# Altium PCB PCB1.PcbDoc
Units mm, origin at the board's own origin, x right, y up, seen from the top; angles counter-clockwise.
Board outline 86 x 38 mm, 2 copper layers (Top Layer, Bottom Layer), stack 1.571 mm thick; 25 components, 104 nets, 291 pads, 77 vias.
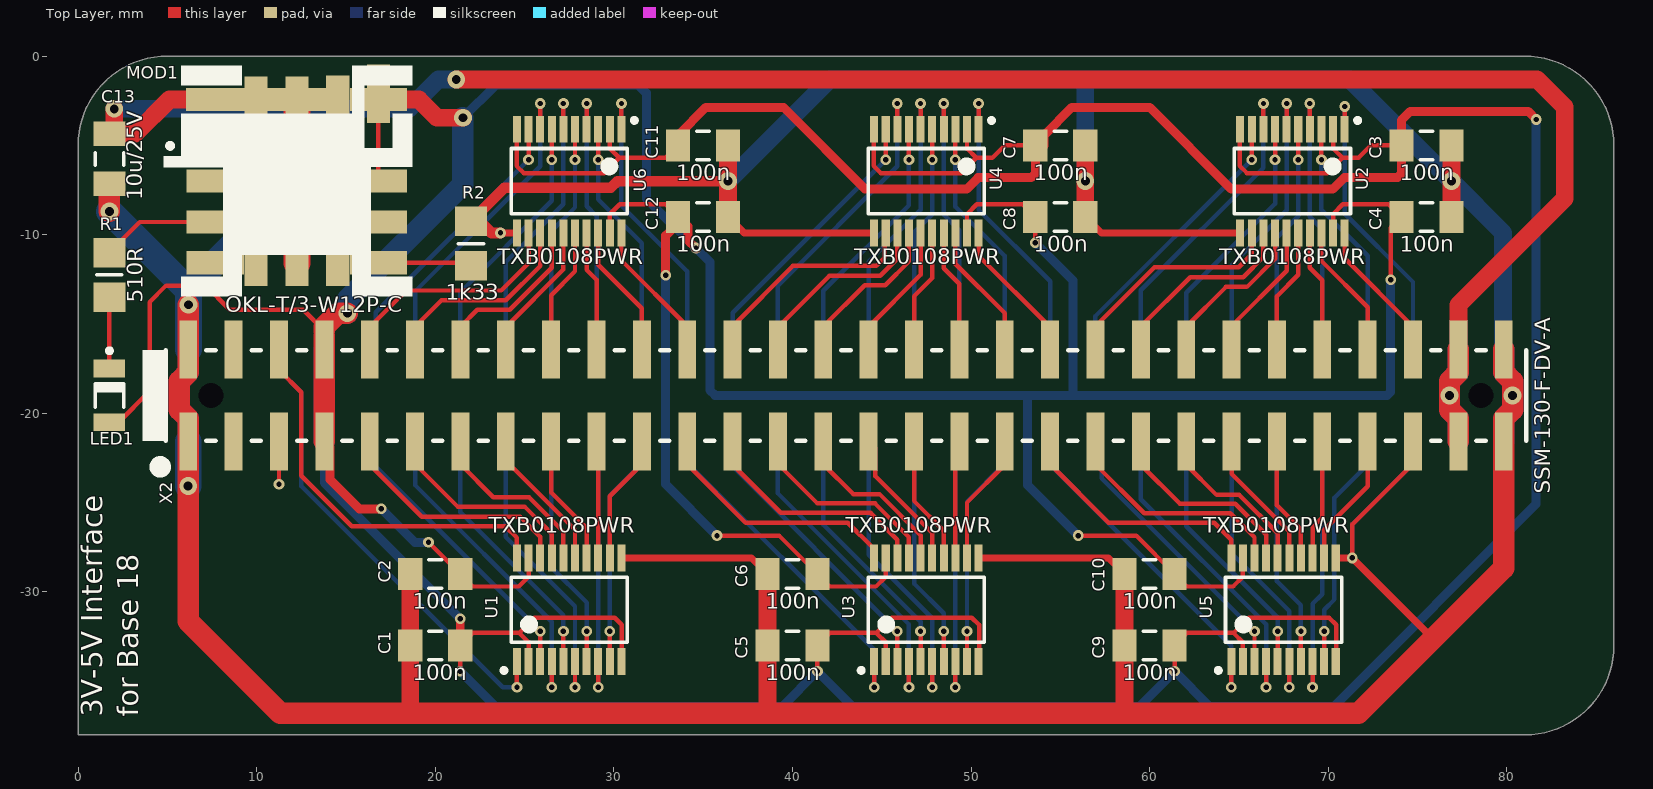
[diagram p0: Top Layer view]
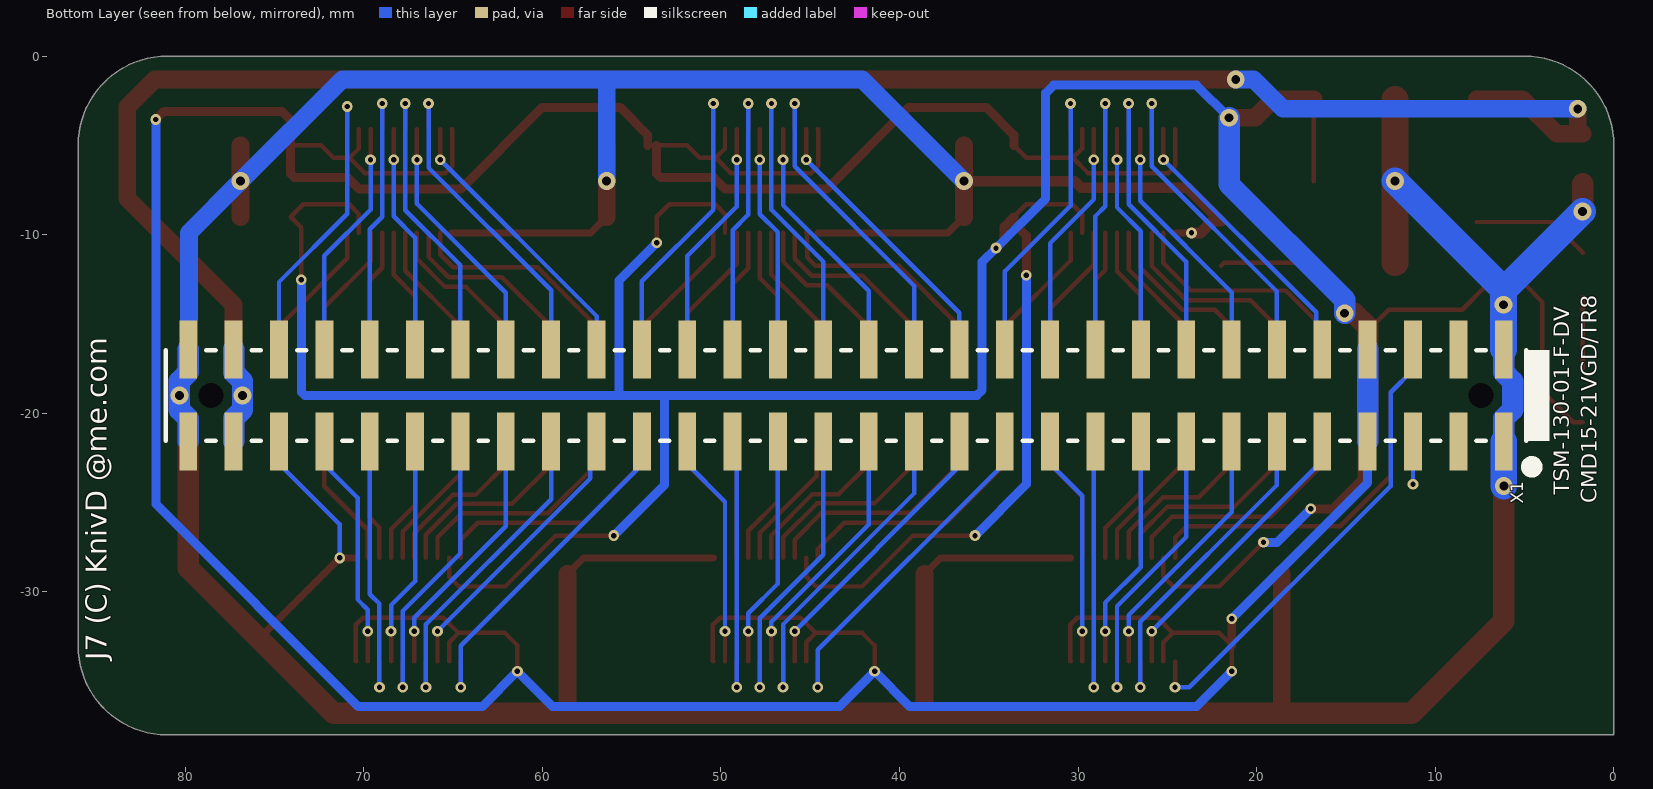
[diagram p1: Bottom Layer view, seen from below]
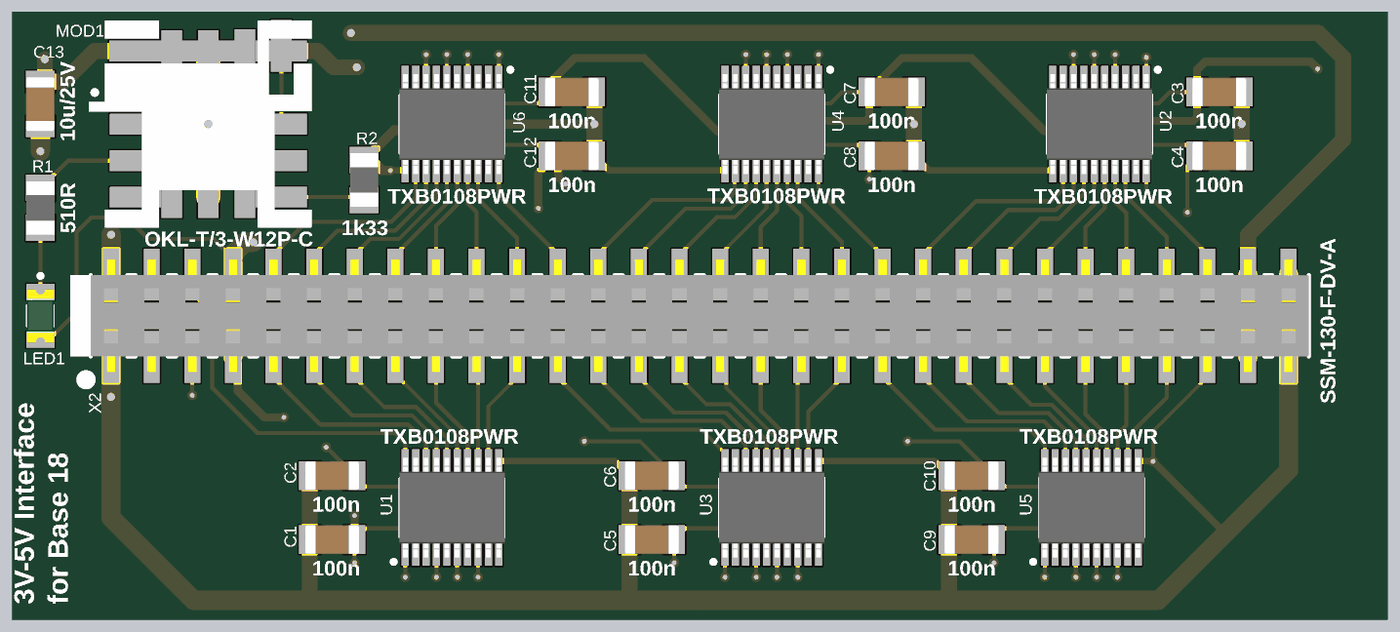
[diagram p2: 3D render of the assembled board from above, using the file's embedded part models]

## Layer stack, top to bottom
Top Solder: solder mask 0.0102, Solder Resist, Dk 3.5
Top Layer: signal copper 0.0356
Dielectric 1: core 1.5, FR-4, Dk 4.2
Bottom Layer: signal copper 0.0356
Solder Side: solder mask 0.0102, Solder Resist, Dk 3.5

## Board outline
0,-38 0,-5 cw(c5,-5) 5,0 81,0 cw(c81,-5) 86,-5 86,-33.016 cw(c81,-33.016) 81.399,-38

## Design rules (kind name [scope] priority, off if disabled: settings)
Clearance Clearance_Pour [IsRegion] p1: gap=0.3 ignorepadtopadclearanceinfootprint=TRUE
Clearance [All] p2: gap=0.2 ignorepadtopadclearanceinfootprint=TRUE
Height [All] p1: minheight=0 maxheight=100 prefheight=12.7
HoleSize [All] p1: absolutevalues=TRUE maxlimit=5 minlimit=0.025 maxpercent=80.000 minpercent=20.000
HoleToHoleClearance [All] p1: gap=0 allowstackedmicrovias=TRUE
MinimumSolderMaskSliver [All] p1: minsoldermaskwidth=0
PolygonConnect [All] p1: thpad.connectstyle=Relief thpad.reliefconductorwidth=0.25 thpad.reliefentries=4 thpad.polygonreliefangle="90 Angle" thpad.airgapwidth=0.25 smdpad.connectstyle=Relief smdpad.reliefconductorwidth=0.25 smdpad.reliefentries=4 smdpad.polygonreliefangle="90 Angle" smdpad.airgapwidth=0.25 via.connectstyle=Direct via.reliefconductorwidth=0.254 via.reliefentries=4 via.polygonreliefangle="45 Angle" via.airgapwidth=0.254
RoutingVias [All] p1: holewidth=0.3 width=0.6 viastyle="Through Hole" minholewidth=0.25 minwidth=0.5 maxholewidth=1.5 maxwidth=3
SilkToSilkClearance [All] p1: silktosilkclearance=-10
SilkToSolderMaskClearance [IsPad] p1: minsilkscreentomaskgap=-10 clearancetoexposedcopper=TRUE
SolderMaskExpansion SolderMaskExpansion_VIA [IsVia] p1: expansion=-0.3 soldermaskfromhole=TRUE
SolderMaskExpansion [All] p2: expansion=0.102
Width [All] p1: maxlimit=10 minlimit=0.2 preferedwidth=0.25
24 further rules are at their usual default settings.

## Components (designator, comment, footprint, x,y, rotation, side; value= is the part's Value field where it differs from the comment)
C1 "100n" CAPC3216X110N 20,-33 r180 top locked
C2 "100n" CAPC3216X110N 20,-29 r180 top locked
C3 "100n" CAPC3216X110N 75.5,-5 r0 top locked
C4 "100n" CAPC3216X110N 75.5,-9 r0 top locked
C5 "100n" CAPC3216X110N 40,-33 r180 top locked
C6 "100n" CAPC3216X110N 40,-29 r180 top locked
C7 "100n" CAPC3216X110N 55,-5 r0 top locked
C8 "100n" CAPC3216X110N 55,-9 r0 top locked
C9 "100n" CAPC3216X110N 60,-33 r180 top locked
C10 "100n" CAPC3216X110N 60,-29 r180 top locked
C11 "100n" CAPC3216X110N 35,-5 r0 top locked
C12 "100n" CAPC3216X110N 35,-9 r0 top locked
C13 "10u/25V" CAPC3216X110N 1.75,-5.75 r90 top locked
LED1 "CMD15-21VGD/TR8" LED_OSRAM_LGN971 1.75,-19 r270 top locked
MOD1 "OKL-T/3-W12P-C" OKL-T/3-W12 12.25,-7 r0 top locked
R1 "510R" RESC3216X75N 1.75,-12.25 r270 top locked
R2 "1k33" RESC3216X75N 22,-10.5 r270 top locked
U1 "TXB0108PWR" SOP65P640X120-20N 27.5,-31 r90 top locked
U2 "TXB0108PWR" SOP65P640X120-20N 68,-7 r270 top locked
U3 "TXB0108PWR" SOP65P640X120-20N 47.5,-31 r90 top locked
U4 "TXB0108PWR" SOP65P640X120-20N 47.5,-7 r270 top locked
U5 "TXB0108PWR" SOP65P640X120-20N 67.5,-31 r90 top locked
U6 "TXB0108PWR" SOP65P640X120-20N 27.5,-7 r270 top locked
X1 "TSM-130-01-F-DV" 2015-2X30XD-M 43,-19 r0 bottom locked
X2 "SSM-130-F-DV-A" 2015-2X30XD-F 43,-19 r0 top locked

## Footprints (in the part's own frame and the unit in brackets; to place one, negate y for a bottom-side part, rotate by r counter-clockwise, add the part's x,y. Pads: shape width x height; smd on the part's side, far side on the other; paste and mask are expansions set on the pad)
2015-2X30XD-F [mm] "Pin Header, 2.54mm x 2.54mm"
  rect 1x3.25 smd: 1(-36.83,-2.575) 2(-36.83,2.575) 3(-34.29,-2.575) 4(-34.29,2.575) 5(-31.75,-2.575) 6(-31.75,2.575) 7(-29.21,-2.575) 8(-29.21,2.575) 9(-26.67,-2.575) 10(-26.67,2.575) 11(-24.13,-2.575) 12(-24.13,2.575) 13(-21.59,-2.575) 14(-21.59,2.575) 15(-19.05,-2.575) 16(-19.05,2.575) 17(-16.51,-2.575) 18(-16.51,2.575) 19(-13.97,-2.575) 20(-13.97,2.575) 21(-11.43,-2.575) 22(-11.43,2.575) 23(-8.89,-2.575) 24(-8.89,2.575) 25(-6.35,-2.575) 26(-6.35,2.575) 27(-3.81,-2.575) 28(-3.81,2.575) 29(-1.27,-2.575) 30(-1.27,2.575) 31(1.27,-2.575) 32(1.27,2.575) 33(3.81,-2.575) 34(3.81,2.575) 35(6.35,-2.575) 36(6.35,2.575) 37(8.89,-2.575) 38(8.89,2.575) 39(11.43,-2.575) 40(11.43,2.575) 41(13.97,-2.575) 42(13.97,2.575) 43(16.51,-2.575) 44(16.51,2.575) 45(19.05,-2.575) 46(19.05,2.575) 47(21.59,-2.575) 48(21.59,2.575) 49(24.13,-2.575) 50(24.13,2.575) 51(26.67,-2.575) 52(26.67,2.575) 53(29.21,-2.575) 54(29.21,2.575) 55(31.75,-2.575) 56(31.75,2.575) 57(34.29,-2.575) 58(34.29,2.575) 59(36.83,-2.575) 60(36.83,2.575)
  silkscreen extent -39.4,-4.3 38.1,2.54, body extent -38.1,-3.52 38.1,3.52, height 7.37
2015-2X30XD-M [mm] "Pin Header, 2.54mm x 2.54mm"
  round 0 hole 1.4 unplated: 0(-35.56,0) 0(35.56,0)
  rect 1x3.25 smd: 1(-36.83,2.575) 2(-36.83,-2.575) 3(-34.29,2.575) 4(-34.29,-2.575) 5(-31.75,2.575) 6(-31.75,-2.575) 7(-29.21,2.575) 8(-29.21,-2.575) 9(-26.67,2.575) 10(-26.67,-2.575) 11(-24.13,2.575) 12(-24.13,-2.575) 13(-21.59,2.575) 14(-21.59,-2.575) 15(-19.05,2.575) 16(-19.05,-2.575) 17(-16.51,2.575) 18(-16.51,-2.575) 19(-13.97,2.575) 20(-13.97,-2.575) 21(-11.43,2.575) 22(-11.43,-2.575) 23(-8.89,2.575) 24(-8.89,-2.575) 25(-6.35,2.575) 26(-6.35,-2.575) 27(-3.81,2.575) 28(-3.81,-2.575) 29(-1.27,2.575) 30(-1.27,-2.575) 31(1.27,2.575) 32(1.27,-2.575) 33(3.81,2.575) 34(3.81,-2.575) 35(6.35,2.575) 36(6.35,-2.575) 37(8.89,2.575) 38(8.89,-2.575) 39(11.43,2.575) 40(11.43,-2.575) 41(13.97,2.575) 42(13.97,-2.575) 43(16.51,2.575) 44(16.51,-2.575) 45(19.05,2.575) 46(19.05,-2.575) 47(21.59,2.575) 48(21.59,-2.575) 49(24.13,2.575) 50(24.13,-2.575) 51(26.67,2.575) 52(26.67,-2.575) 53(29.21,2.575) 54(29.21,-2.575) 55(31.75,2.575) 56(31.75,-2.575) 57(34.29,2.575) 58(34.29,-2.575) 59(36.83,2.575) 60(36.83,-2.575)
  silkscreen extent -39.4,-2.54 38.1,4.3, body extent -38.1,-3.85 38.1,3.85, height 9.65
CAPC3216X110N [mm] "Chip Capacitor, Body 3.2x1.6mm, IPC Medium Density"
  rect 1.35x1.8 smd: 1(-1.4,0) 2(1.4,0)
  silkscreen extent -0.35,-0.8 0.35,0.8, body extent -1.7,-0.9 1.7,0.9, height 1.1
LED_OSRAM_LGN971 [mm] "Green Chip LED, 2-Leads, Body 3.2 x1.6mm, IPC Medium Density"
  rect 1x1.75 smd: 1(-1.5,0) 2(1.5,0)
  silkscreen extent -2.62,-0.8 0.65,0.8, body extent -1.65,-0.85 1.65,0.85, height 1.2
OKL-T/3-W12 [mm] "[Murata] 12.7x12.7mm 3A DC-DC module"
  rect 3.2x1.3 smd: 1(-4.57,0) 2(-4.57,4.57) 4(4.57,4.57) 5(4.57,0) 6(4.57,-4.57) 9(-4.57,-4.57) 10(-4.57,-2.29) 11(4.57,-2.29)
  rect 3.26x1.3 smd: 2(-4.57,4.57)
  rect 1.3x2.6 smd: 2(-2.29,4.57) 3(0,4.57) 7(0,-4.57) 8(-2.29,-4.57) 12(2.29,-4.57)
  rect 3.585x1.3 smd: 3(-0.15,4.57)
  rect 1.3x2.7 smd: 3(2.29,4.57)
  rect 1.3x3.26 smd: 4(4.57,4.895)
  silkscreen extent -7.48,-6.48 6.48,6.48, body extent -6.48,-6.48 6.47,6.48, height 5.2
RESC3216X75N [mm] "Chip Resistor, EIA 1206, Metric 3216, Body 3.2x1.6mm, IPC Medium Density"
  rect 1.65x1.8 smd: 1(-1.25,0) 2(1.25,0)
  silkscreen extent 0,-0.7 0,0.7, body extent -1.67,-0.87 1.68,0.88, height 0.75
SOP65P640X120-20N [mm] "SOP, 20-Leads, Body 6.5x4.4mm, Pitch 0.65mm, IPC Medium Density"
  rect 1.5x0.45 smd: 1(-2.9,2.925) 2(-2.9,2.275) 3(-2.9,1.625) 4(-2.9,0.975) 5(-2.9,0.325) 6(-2.9,-0.325) 7(-2.9,-0.975) 8(-2.9,-1.625) 9(-2.9,-2.275) 10(-2.9,-2.925) 11(2.9,-2.925) 12(2.9,-2.275) 13(2.9,-1.625) 14(2.9,-0.975) 15(2.9,-0.325) 16(2.9,0.325) 17(2.9,0.975) 18(2.9,1.625) 19(2.9,2.275) 20(2.9,2.925)
  silkscreen extent -3.52,-3.25 1.82,3.77, body extent -3.12,-3.3 3.12,3.3, height 1.2

## Part data
C1 C2 C3 C4 C5 C6 C7 C8 C9 C10 C11 C12 C13: library part Capacitor, "Capacitor"
  C13: Note=10u/25V
LED1: library part LED, "Light Emitting Diode"
MOD1: library part OKL-T/3-W12, "Programmable Output 3-Amp iLGA SMT PoLs", Manufacturer=Murata
R1 R2: library part Resistor, "Resistor"
U1 U2 U3 U4 U5 U6: "8-bit bidirectional voltage translator", Manufacturer="Texas Instruments"
X1 X2: library part "Connector 2x30", "Dual row, 60-way connector"

## Via types
v1: diameter 0.6, hole 0.3, Top Layer to Bottom Layer, tented both sides, 64 vias
v2: diameter 1, hole 0.5, Top Layer to Bottom Layer, tented both sides, 13 vias

## Nets (pads, with @x,y where several pads share a name; then routed paths per layer and width w, separated by ;. In a path a pad name is that pad's centre, name@x,y a point inside that pad or via, vN(x,y) a via of type N, cw(c..) or ccw(c..) an arc to the next point about the centre after c; other vN are vias at no path point)
+3V3: C1.1 C3.1 C5.1 C7.1 C9.1 C11.1 U1.2 U1.10 U2.2 U2.10 U3.2 U3.10 U4.2 U4.10 U5.2 U5.10 U6.2 U6.10 X1.7 X1.8 | length 256.5
  Top Layer w0.25: v1(21.4,-34.45) C1.1 22.1,-32.3 24.7,-32.3 ; U6.10 24.55,-4.125 24.55,-6.15 24.95,-6.55 29.45,-6.55 30.3,-5.7 ; U1.2 25.225,-32.825 24.7,-32.3 ; U6.2 29.775,-5.175 30.3,-5.7 ; U1.10 30.45,-33.875 30.45,-31.85 30.05,-31.45 25.55,-31.45 24.7,-32.3 ; C11.1 32.9,-5.7 30.3,-5.7 ; v1(41.4,-34.45) C5.1 42.1,-32.3 44.7,-32.3 ; U4.10 44.55,-4.125 44.55,-6.15 44.95,-6.55 49.45,-6.55 50.3,-5.7 ; U3.2 45.225,-32.825 44.7,-32.3 ; U4.2 49.775,-5.175 50.3,-5.7 ; U3.10 50.45,-33.875 50.45,-31.85 50.05,-31.45 45.55,-31.45 44.7,-32.3 ; C7.1 51.9,-5 51.2,-5.7 50.3,-5.7 ; v1(61.4,-34.45) C9.1 62.1,-32.3 64.7,-32.3 ; U2.10 65.05,-4.125 65.05,-6.15 65.45,-6.55 69.95,-6.55 70.8,-5.7 ; U5.2 65.225,-32.825 64.7,-32.3 ; U2.2 70.275,-5.175 70.8,-5.7 ; U5.10 70.45,-33.875 70.45,-31.85 70.05,-31.45 65.55,-31.45 64.7,-32.3 ; C3.1 72.4,-5 71.7,-5.7 70.8,-5.7
  Top Layer w0.5: C1.1 v1(21.4,-31.5) ; C11.1 33.6,-4.425 35.15,-2.875 39.5,-2.875 44.075,-7.45 49.75,-7.45 50.4,-6.8 53.375,-6.8 53.6,-6.575 C7.1 ; C7.1@54.1,-5 54.1,-4.425 55.65,-2.875 60,-2.875 64.575,-7.45 70.25,-7.45 70.9,-6.8 73.875,-6.8 74.1,-6.575 C3.1 74.1,-3.6 74.6,-3.1 81.2,-3.1 v1(81.65,-3.55)
  Bottom Layer w0.5: X1.7 13.79,-23.89 v1(21.4,-31.5) ; v1(21.4,-34.45) 23.375,-36.425 39.425,-36.425 v1(41.4,-34.45) 43.375,-36.425 59.425,-36.425 v1(61.4,-34.45) 63.375,-36.425 70.3,-36.425 81.65,-25.075 v1(81.65,-3.55)
  Bottom Layer w1.2: X1.7 X1.8
+5V: C2.1 C4.1 C6.1 C8.1 C10.1 C12.1 LED1.2 MOD1.4 MOD1.5 U1.19 U2.19 U3.19 U4.19 U5.19 U6.19 X2.7 X2.8 | length 226.5
  Top Layer w0.25: LED1.2 2.275,-20.5 4,-18.775 4,-13.775 4.925,-12.85 7.15,-12.85 8.5,-14.2 12.6,-14.2 13.79,-15.39 X2.8@13.79,-15.66 ; X2.7 X2.7@14.1,-21.885 ; MOD1.5 MOD1.4@16.82,-2.43 ; v1(19.625,-27.225) C2.1 22.1,-29.7 24.675,-29.7 25.225,-29.15 U1.19 ; U6.19 29.775,-8.85 30.325,-8.3 32.9,-8.3 C12.1 C12.1@33.6,-9.35 ; v1(35.775,-26.85) 39.25,-26.85 C6.1 42.1,-29.7 44.675,-29.7 45.225,-29.15 U3.19 ; U4.19 49.775,-8.85 50.325,-8.3 52.9,-8.3 C8.1 v1(53.6,-10.45) ; v1(56,-26.85) 59.25,-26.85 C10.1 62.1,-29.7 64.675,-29.7 65.225,-29.15 U5.19 ; U2.19 70.275,-8.85 70.825,-8.3 73.4,-8.3 C4.1 73.5,-9.6 v1(73.5,-12.525)
  Top Layer w0.5: X2.7@14.1,-21.885 14.1,-23.7 15.75,-25.35 v1(16.975,-25.35) ; v1(32.9,-12.275) 32.9,-10.05 C12.1@33.6,-9.35 ; C12.1 34.15,-9.55 34.15,-10.3 v1(34.6,-10.75)
  Top Layer w1: MOD1.4@16.82,-2.43 19.08,-2.43 20.1,-3.45 v2(21.55,-3.45)
  Top Layer w1.2: X2.7 X2.8 X2.8@13.79,-15.66 ; X2.8@13.79,-15.39 13.79,-15.16 14.55,-14.4 v2(15.075,-14.4)
  Bottom Layer w0.5: v1(16.975,-25.35) 18.85,-27.225 v1(19.625,-27.225) ; v2(21.55,-3.45) 23.375,-1.625 31.375,-1.625 31.825,-2.075 31.825,-7.975 v1(34.6,-10.75) 35.375,-11.525 35.375,-18.7 35.675,-19 53.175,-19 ; v1(32.9,-12.275) 32.9,-23.975 v1(35.775,-26.85) ; v1(53.6,-10.45) 55.7,-12.55 55.7,-18.975 ; v1(56,-26.85) 53.175,-24.025 53.175,-19 ; v1(73.5,-12.525) 73.5,-18.8 73.3,-19 53.175,-19
  Bottom Layer w1.2: v2(15.075,-14.4) 15.075,-13.65 21.55,-7.175 v2(21.55,-3.45)
+Vin: C13.2 MOD1.2 X1.57 X1.58 X2.57 X2.58 | length 118
  Top Layer w1: v2(2.025,-2.95) 2.025,-4.075 C13.2 3.2,-4.35 5.12,-2.43 MOD1.2@7.68,-2.43 ; v2(21.175,-1.3) 81.7,-1.3 83.25,-2.85 83.25,-7.975 ; X2.58 77.29,-13.935 83.25,-7.975
  Top Layer w1.2: X2.57 77.29,-20.295 76.795,-19.8 v2(76.795,-19) 76.795,-18.2 77.29,-17.705 X2.58
  Bottom Layer w1: v2(2.025,-2.95) 18.525,-2.95 20.175,-1.3 v2(21.175,-1.3)
  Bottom Layer w1.2: X1.57 77.29,-20.295 76.795,-19.8 v2(76.795,-19) 76.795,-18.2 77.29,-17.705 X1.58
A00: U1.6 X1.15 | length 16.8
  Top Layer w0.25: v1(27.825,-35.35) U1.6
  Bottom Layer w0.25: X1.15 23.95,-26.925 27.825,-30.8 v1(27.825,-35.35)
A00_5V: U1.15 X2.15 | length 8.1
  Top Layer w0.25: X2.15 23.95,-22.65 27.825,-26.525 U1.15
A01: U1.7 X1.17 | length 13.1
  Top Layer w0.25: U1.7 v1(28.475,-32.2)
  Bottom Layer w0.25: X1.17 26.49,-28.615 28.475,-30.6 v1(28.475,-32.2)
A01_5V: U1.14 X2.17 | length 7.3
  Top Layer w0.25: X2.17 26.49,-24.44 28.475,-26.425 U1.14
A02: U1.8 X1.19 | length 15.3
  Top Layer w0.25: v1(29.125,-35.35) U1.8
  Bottom Layer w0.25: X1.19 29.125,-21.67 v1(29.125,-35.35)
A02_5V: U1.13 X2.19 | length 6.6
  Top Layer w0.25: X2.19 29.125,-21.67 U1.13
A03: U1.9 X1.21 | length 13.1
  Top Layer w0.25: U1.9 v1(29.775,-32.2)
  Bottom Layer w0.25: v1(29.775,-32.2) 29.775,-24.625 31.57,-22.83 X1.21
A03_5V: U1.12 X2.21 | length 7.3
  Top Layer w0.25: U1.12 29.775,-24.65 31.57,-22.855 X2.21
A04: U3.1 X1.23 | length 19.6
  Top Layer w0.25: v1(44.575,-35.35) U3.1
  Bottom Layer w0.25: X1.23 34.11,-22.785 44.575,-33.25 v1(44.575,-35.35)
A04_5V: U3.20 X2.23 | length 14.2
  Top Layer w0.25: X2.23 34.11,-22.86 37.375,-26.125 43.1,-26.125 44.575,-27.6 U3.20
A05: U3.3 X1.25 | length 16.1
  Top Layer w0.25: U3.3 v1(45.875,-32.2)
  Bottom Layer w0.25: X1.25 36.65,-22.975 v1(45.875,-32.2)
A05_5V: U3.18 X2.25 | length 13.3
  Top Layer w0.25: X2.25 36.65,-22.875 39.35,-25.575 44.375,-25.575 45.875,-27.075 U3.18
A06: U3.4 X1.27 | length 18.3
  Top Layer w0.25: v1(46.525,-35.35) U3.4
  Bottom Layer w0.25: X1.27 39.19,-24.49 46.525,-31.825 v1(46.525,-35.35)
A06_5V: U3.17 X2.27 | length 11.5
  Top Layer w0.25: X2.27 39.19,-22.84 41.4,-25.05 44.625,-25.05 46.525,-26.95 U3.17
A07: U3.5 X1.29 | length 14.6
  Top Layer w0.25: U3.5 v1(47.175,-32.2)
  Bottom Layer w0.25: X1.29 41.73,-26.23 47.175,-31.675 v1(47.175,-32.2)
A07_5V: U3.16 X2.29 | length 9.6
  Top Layer w0.25: X2.29 41.73,-22.855 43.4,-24.525 44.875,-24.525 47.175,-26.825 U3.16
A08: U3.6 X1.31 | length 16.7
  Top Layer w0.25: v1(47.825,-35.35) U3.6
  Bottom Layer w0.25: X1.31 44.27,-27.92 47.825,-31.475 v1(47.825,-35.35)
A08_5V: U3.15 X2.31 | length 8
  Top Layer w0.25: X2.31 44.65,-21.955 44.65,-23.525 47.825,-26.7 U3.15
A09: U3.7 X1.33 | length 13
  Top Layer w0.25: U3.7 v1(48.475,-32.2)
  Bottom Layer w0.25: X1.33 46.81,-29.535 48.475,-31.2 v1(48.475,-32.2)
A09_5V: U3.14 X2.33 | length 7.2
  Top Layer w0.25: X2.33 46.81,-24.91 48.475,-26.575 U3.14
A10: U3.8 X1.35 | length 15.3
  Top Layer w0.25: v1(49.125,-35.35) U3.8
  Bottom Layer w0.25: v1(49.125,-35.35) 49.125,-21.8 X1.35
A10_5V: U3.13 X2.35 | length 6.6
  Top Layer w0.25: U3.13 49.125,-21.8 X2.35
A11: U3.9 X1.37 | length 13.2
  Top Layer w0.25: U3.9 v1(49.775,-32.2)
  Bottom Layer w0.25: v1(49.775,-32.2) 49.775,-24.95 51.89,-22.835 X1.37
A11_5V: U3.12 X2.37 | length 7.4
  Top Layer w0.25: U3.12 49.775,-25 51.89,-22.885 X2.37
A12: U6.6 X1.16 | length 16.6
  Top Layer w0.25: U6.6 v1(27.175,-2.65)
  Bottom Layer w0.25: X1.16 23.95,-11.525 27.175,-8.3 v1(27.175,-2.65)
A12_5V: U6.15 X2.16 | length 7.9
  Top Layer w0.25: X2.16 23.95,-15.175 27.175,-11.95 U6.15
A13: U6.5 X1.18 | length 12.9
  Top Layer w0.25: v1(27.825,-5.8) U6.5
  Bottom Layer w0.25: X1.18 26.49,-9.81 27.825,-8.475 v1(27.825,-5.8)
A13_5V: U6.16 X2.18 | length 7.1
  Top Layer w0.25: X2.18 26.49,-13.385 27.825,-12.05 U6.16
A14: U6.4 X1.20 | length 15.5
  Top Layer w0.25: U6.4 v1(28.475,-2.65)
  Bottom Layer w0.25: v1(28.475,-2.65) 28.475,-8.4 29.03,-8.955 X1.20
A14_5V: U6.17 X2.20 | length 6.8
  Top Layer w0.25: U6.17 28.475,-11.975 29.03,-12.53 X2.20
A15: U6.3 X1.22 | length 13.3
  Top Layer w0.25: v1(29.125,-5.8) U6.3
  Bottom Layer w0.25: v1(29.125,-5.8) 29.125,-8.025 31.57,-10.47 X1.22
A15_5V: U6.18 X2.22 | length 7.5
  Top Layer w0.25: U6.18 29.125,-11.675 31.57,-14.12 X2.22
A16: U6.1 X1.24 | length 16.8
  Top Layer w0.25: U6.1 v1(30.425,-2.65)
  Bottom Layer w0.25: v1(30.425,-2.65) 30.425,-8.375 34.11,-12.06 X1.24
A16_5V: U6.20 X2.24 | length 8.1
  Top Layer w0.25: U6.20 30.425,-11.45 34.11,-15.135 X2.24
A17: U4.9 X1.26 | length 15.9
  Top Layer w0.25: v1(45.225,-5.8) U4.9
  Bottom Layer w0.25: X1.26 36.65,-14.375 v1(45.225,-5.8)
A17_5V: U4.12 X2.26 | length 12.8
  Top Layer w0.25: X2.26 36.65,-15.125 40.025,-11.75 44.7,-11.75 45.175,-11.275 45.175,-9.95 U4.12
A18: U4.8 X1.28 | length 18
  Top Layer w0.25: U4.8 v1(45.875,-2.65)
  Bottom Layer w0.25: X1.28 39.19,-12.86 45.875,-6.175 v1(45.875,-2.65)
A18_5V: U4.13 X2.28 | length 11
  Top Layer w0.25: X2.28 39.19,-15.185 42.075,-12.3 44.925,-12.3 45.875,-11.35 U4.13
A19: U4.7 X1.30 | length 14.3
  Top Layer w0.25: v1(46.525,-5.8) U4.7
  Bottom Layer w0.25: X1.30 41.73,-13.145 46.525,-8.35 v1(46.525,-5.8)
A19_5V: U4.14 X2.30 | length 9.2
  Top Layer w0.25: X2.30 41.73,-15.145 44.05,-12.825 45.2,-12.825 46.525,-11.5 U4.14
A20: U4.6 X1.32 | length 16.4
  Top Layer w0.25: U4.6 v1(47.175,-2.65)
  Bottom Layer w0.25: X1.32 44.27,-11.505 47.175,-8.6 v1(47.175,-2.65)
A20_5V: U4.15 X2.32 | length 7.7
  Top Layer w0.25: X2.32 44.27,-15.155 47.175,-12.25 U4.15
A21: U4.5 X1.34 | length 12.7
  Top Layer w0.25: v1(47.825,-5.8) U4.5
  Bottom Layer w0.25: X1.34 46.81,-9.865 47.825,-8.85 v1(47.825,-5.8)
A21_5V: U4.16 X2.34 | length 6.9
  Top Layer w0.25: X2.34 46.81,-13.44 47.825,-12.425 U4.16
A22: U4.4 X1.36 | length 15.6
  Top Layer w0.25: U4.4 v1(48.475,-2.65)
  Bottom Layer w0.25: v1(48.475,-2.65) 48.475,-8.875 49.35,-9.75 X1.36
A22_5V: U4.17 X2.36 | length 6.9
  Top Layer w0.25: U4.17 48.475,-11.875 49.35,-12.75 X2.36
A23: U4.3 X1.38 | length 13.5
  Top Layer w0.25: v1(49.125,-5.8) U4.3
  Bottom Layer w0.25: v1(49.125,-5.8) 49.125,-8.425 51.89,-11.19 X1.38
A23_5V: U4.18 X2.38 | length 7.7
  Top Layer w0.25: U4.18 49.125,-11.625 51.89,-14.39 X2.38
BUS#: U6.9 X1.10 | length 16
  Top Layer w0.25: v1(25.225,-5.8) U6.9
  Bottom Layer w0.25: X1.10 16.33,-15.62 16.675,-15.275 16.675,-14.35 v1(25.225,-5.8)
BUS#_5V: U6.12 X2.10 | length 13.3
  Top Layer w0.25: X2.10 16.33,-15.17 18.375,-13.125 23.7,-13.125 25.225,-11.6 U6.12
DB0: U5.1 X1.39 | length 19.4
  Top Layer w0.25: v1(64.575,-35.35) U5.1
  Bottom Layer w0.25: X1.39 54.43,-22.88 64.575,-33.025 v1(64.575,-35.35)
DB0_5V: U5.20 X2.39 | length 14.2
  Top Layer w0.25: X2.39 54.43,-22.855 57.7,-26.125 63.625,-26.125 64.575,-27.075 U5.20
DB1: U5.3 X1.41 | length 16
  Top Layer w0.25: U5.3 v1(65.875,-32.2)
  Bottom Layer w0.25: X1.41 57.325,-21.93 57.325,-23.65 v1(65.875,-32.2)
DB1_5V: U5.18 X2.41 | length 13
  Top Layer w0.25: X2.41 56.97,-22.87 59.7,-25.6 64.525,-25.6 65.875,-26.95 U5.18
DB2: U5.4 X1.43 | length 18.1
  Top Layer w0.25: v1(66.525,-35.35) U5.4
  Bottom Layer w0.25: X1.43 59.51,-24.81 66.525,-31.825 v1(66.525,-35.35)
DB2_5V: U5.17 X2.43 | length 11.2
  Top Layer w0.25: X2.43 59.51,-22.885 61.7,-25.075 64.8,-25.075 66.525,-26.8 U5.17
DB3: U5.5 X1.45 | length 14.4
  Top Layer w0.25: U5.5 v1(67.175,-32.2)
  Bottom Layer w0.25: X1.45 62.05,-26.325 67.175,-31.45 v1(67.175,-32.2)
DB3_5V: U5.16 X2.45 | length 9.4
  Top Layer w0.25: X2.45 62.05,-22.875 63.75,-24.575 65.025,-24.575 67.175,-26.725 U5.16
DB4: U5.6 X1.47 | length 16.6
  Top Layer w0.25: v1(67.825,-35.35) U5.6
  Bottom Layer w0.25: X1.47 64.59,-27.84 67.825,-31.075 v1(67.825,-35.35)
DB4_5V: U5.15 X2.47 | length 7.9
  Top Layer w0.25: X2.47 64.59,-23.39 67.825,-26.625 U5.15
DB5: U5.7 X1.49 | length 12.9
  Top Layer w0.25: U5.7 v1(68.475,-32.2)
  Bottom Layer w0.25: X1.49 67.13,-29.405 68.475,-30.75 v1(68.475,-32.2)
DB5_5V: U5.14 X2.49 | length 7.1
  Top Layer w0.25: X2.49 67.13,-25.155 68.475,-26.5 U5.14
DB6: U5.8 X1.51 | length 15.5
  Top Layer w0.25: v1(69.125,-35.35) U5.8
  Bottom Layer w0.25: v1(69.125,-35.35) 69.125,-30.675 69.67,-30.13 X1.51
DB6_5V: U5.13 X2.51 | length 6.8
  Top Layer w0.25: U5.13 69.125,-26.4 69.67,-25.855 X2.51
DB7: U5.9 X1.53 | length 13.3
  Top Layer w0.25: U5.9 v1(69.775,-32.2)
  Bottom Layer w0.25: v1(69.775,-32.2) 69.775,-31 70.35,-30.425 70.35,-24.725 72.21,-22.865 X1.53
DB7_5V: U5.12 X2.53 | length 7.5
  Top Layer w0.25: U5.12 69.775,-26.525 72.21,-24.09 X2.53
GND: C1.2 C2.2 C3.2 C4.2 C5.2 C6.2 C7.2 C8.2 C9.2 C10.2 C11.2 C12.2 C13.1 MOD1.3 MOD1.7 R2.1 U1.11 U2.11 U3.11 U4.11 U5.11 U6.11 X1.1 X1.2 X1.55 X1.59 X1.60 X2.1 X2.2 X2.55 X2.59 X2.60 | length 325.7
  Top Layer w0.25: v1(71.35,-28.1) 71.35,-26.225 74.75,-22.825 X2.55
  Top Layer w0.4: v1(23.65,-9.9) U6.11 ; U1.11 37.7,-28.1 C6.2 ; C12.2 37.3,-9.9 U4.11 ; U3.11 57.7,-28.1 C10.2 ; C8.2 57.3,-9.9 U2.11 ; U5.11 v1(71.35,-28.1) 75.75,-32.5 75.75,-32.75
  Top Layer w0.6: v1(23.65,-9.9) 23.15,-9.9 22.5,-9.25 R2.1 23.875,-7.375 29.825,-7.375 30.2,-7 v2(36.4,-7)
  Top Layer w1: 18.55,-36.8 18.6,-36.75 C1.2 C2.2 ; C12.2 v2(36.4,-7) C11.2 ; 38.4,-36.8 38.6,-36.6 C6.2 ; C8.2 v2(56.4,-7) C7.2 ; 58.525,-36.8 58.6,-36.725 C10.2 ; C4.2 v2(76.9,-7) C3.2
  Top Layer w1.2: v2(1.75,-8.7) C13.1 ; v2(6.175,-13.925) 6.175,-16.42 X2.2 6.17,-17.705 5.675,-18.2 5.675,-19.8 6.17,-20.295 X2.1 6.17,-31.645 11.325,-36.8 18.55,-36.8 38.4,-36.8 58.525,-36.8 71.7,-36.8 75.75,-32.75 79.83,-28.67 X2.59 79.83,-20.295 80.325,-19.8 80.325,-18.2 79.83,-17.705 X2.60
  Top Layer w1.5: MOD1.7 v2(12.25,-7) MOD1.3@12.25,-2.43
  Bottom Layer w0.25: v1(71.35,-28.1) 71.35,-26.225 74.75,-22.825 X1.55
  Bottom Layer w1: v2(36.4,-7) 42.1,-1.3 56.35,-1.3 ; v2(56.4,-7) 56.4,-1.35 56.35,-1.3 ; X1.60 79.8,-16.395 79.8,-9.9 v2(76.9,-7) 71.2,-1.3 56.35,-1.3
  Bottom Layer w1.2: X1.1 6.17,-20.295 5.675,-19.8 5.675,-18.2 6.17,-17.705 X1.2 ; v2@6.17,-13.93 v2(6.175,-13.925) ; X1.59 79.83,-20.295 80.325,-19.8 v2(80.325,-19) 80.325,-18.2 ; X1.60 79.83,-17.705 80.325,-18.2
  Bottom Layer w1.5: v2(1.75,-8.7) 6.125,-13.075 6.175,-13.075 ; v2(6.165,-24.075) X1.1@6.165,-21.58 ; X1.2 6.175,-16.42 v2(6.175,-13.925) 6.175,-13.075 ; v2(12.25,-7) 6.175,-13.075
INT0#: U1.3 X1.9 | length 16.3
  Top Layer w0.25: U1.3 v1(25.875,-32.2)
  Bottom Layer w0.25: X1.9 16.33,-22.655 v1(25.875,-32.2)
INT0#_5V: U1.18 X2.9 | length 13.7
  Top Layer w0.25: X2.9 16.33,-22.88 19.25,-25.8 24.75,-25.8 25.875,-26.925 U1.18
INT1#: U1.4 X1.11 | length 18.4
  Top Layer w0.25: v1(26.525,-35.35) U1.4
  Bottom Layer w0.25: X1.11 18.87,-24.02 26.525,-31.675 v1(26.525,-35.35)
INT1#_5V: U1.17 X2.11 | length 11.9
  Top Layer w0.25: X2.11 18.87,-22.845 21.25,-25.225 25,-25.225 26.525,-26.75 U1.17
INT2#: U1.5 X1.13 | length 14.7
  Top Layer w0.25: U1.5 v1(27.175,-32.2)
  Bottom Layer w0.25: X1.13 21.41,-25.535 27.175,-31.3 v1(27.175,-32.2)
INT2#_5V: U1.16 X2.13 | length 10.1
  Top Layer w0.25: X2.13 21.41,-22.86 23.25,-24.7 25.25,-24.7 27.175,-26.625 U1.16
MCLR#: X1.5 X2.5 | length 4.8
  Top Layer w0.25: v1(11.25,-23.975) X2.5
  Bottom Layer w0.25: v1(11.25,-23.975) X1.5
MISO: U2.6 X1.48 | length 16.5
  Top Layer w0.25: U2.6 v1(67.675,-2.65)
  Bottom Layer w0.25: X1.48 64.59,-11.71 67.675,-8.625 v1(67.675,-2.65)
MISO_5V: U2.15 X2.48 | length 7.8
  Top Layer w0.25: X2.48 64.59,-15.11 67.675,-12.025 U2.15
MOSI: U2.7 X1.46 | length 14.4
  Top Layer w0.25: v1(67.025,-5.8) U2.7
  Bottom Layer w0.25: X1.46 62.05,-13.25 67.025,-8.275 v1(67.025,-5.8)
MOSI_5V: U2.14 X2.46 | length 9.3
  Top Layer w0.25: X2.46 62.05,-15.15 64.275,-12.925 65.45,-12.925 67.025,-11.35 U2.14
NetLED1_1: LED1.1 R1.2 | length 4
  Top Layer w0.25: LED1.1 R1.2
NetMOD1_6: MOD1.6 R2.2 | length 5.3
  Top Layer w0.25: MOD1.6 21.82,-11.57 R2.2
NetMOD1_10: MOD1.10 R1.1 | length 6.6
  Top Layer w0.25: R1.1 3.46,-9.29 MOD1.10
RD#: U6.7 X1.14 | length 14.4
  Top Layer w0.25: v1(26.525,-5.8) U6.7
  Bottom Layer w0.25: X1.14 21.41,-13.215 26.525,-8.1 v1(26.525,-5.8)
RD#_5V: U6.14 X2.14 | length 9.7
  Top Layer w0.25: X2.14 21.41,-15.14 22.35,-14.2 24.175,-14.2 26.525,-11.85 U6.14
RESET#: U1.1 X1.6 | length 26.4
  Top Layer w0.25: v1(24.575,-35.35) U1.1
  Bottom Layer w0.25: X1.6 11.25,-17.575 12.5,-18.825 12.5,-24.075 23.775,-35.35 v1(24.575,-35.35)
RESET#_5V: U1.20 X2.6 | length 22.2
  Top Layer w0.25: X2.6 11.25,-17.575 12.5,-18.825 12.5,-23.5 15.325,-26.325 23.925,-26.325 24.575,-26.975 U1.20
RXD: U2.9 X1.42 | length 16
  Top Layer w0.25: v1(65.725,-5.8) U2.9
  Bottom Layer w0.25: X1.42 56.97,-14.555 v1(65.725,-5.8)
RXD_5V: U2.12 X2.42 | length 12.9
  Top Layer w0.25: X2.42 56.97,-15.13 60.275,-11.825 65,-11.825 65.725,-11.1 U2.12
SCLK: U2.8 X1.44 | length 18.1
  Top Layer w0.25: U2.8 v1(66.375,-2.65)
  Bottom Layer w0.25: X1.44 59.51,-13.115 66.375,-6.25 v1(66.375,-2.65)
SCLK_5V: U2.13 X2.44 | length 11.1
  Top Layer w0.25: X2.44 59.51,-15.14 62.275,-12.375 65.25,-12.375 66.375,-11.25 U2.13
SEL0#: U2.5 X1.50 | length 12.8
  Top Layer w0.25: v1(68.325,-5.8) U2.5
  Bottom Layer w0.25: X1.50 67.13,-10.17 68.325,-8.975 v1(68.325,-5.8)
SEL0#_5V: U2.16 X2.50 | length 7
  Top Layer w0.25: X2.50 67.13,-13.445 68.325,-12.25 U2.16
SEL1#: U2.4 X1.52 | length 15.5
  Top Layer w0.25: U2.4 v1(68.975,-2.65)
  Bottom Layer w0.25: v1(68.975,-2.65) 68.975,-9 69.67,-9.695 X1.52
SEL1#_5V: U2.17 X2.52 | length 6.8
  Top Layer w0.25: U2.17 68.975,-11.85 69.67,-12.545 X2.52
SEL2#: U2.3 X1.54 | length 13.4
  Top Layer w0.25: v1(69.625,-5.8) U2.3
  Bottom Layer w0.25: v1(69.625,-5.8) 69.625,-8.6 72.21,-11.185 X1.54
SEL2#_5V: U2.18 X2.54 | length 7.6
  Top Layer w0.25: U2.18 69.625,-11.475 72.21,-14.06 X2.54
SEL3#: U2.1 X1.56 | length 16.5
  Top Layer w0.25: U2.1 v1(70.925,-2.825)
  Bottom Layer w0.25: v1(70.925,-2.825) 70.925,-8.825 74.75,-12.65 X1.56
SEL3#_5V: U2.20 X2.56 | length 8.1
  Top Layer w0.25: U2.20 70.925,-11.325 74.75,-15.15 X2.56
TXD: U4.1 X1.40 | length 16.9
  Top Layer w0.25: U4.1 v1(50.425,-2.65)
  Bottom Layer w0.25: v1(50.425,-2.65) 50.425,-8.6 54.43,-12.605 X1.40
TXD_5V: U4.20 X2.40 | length 8.2
  Top Layer w0.25: U4.20 50.425,-11.175 54.43,-15.18 X2.40
WR#: U6.8 X1.12 | length 18.1
  Top Layer w0.25: U6.8 v1(25.875,-2.65)
  Bottom Layer w0.25: X1.12 18.87,-13.18 25.875,-6.175 v1(25.875,-2.65)
WR#_5V: U6.13 X2.12 | length 11.5
  Top Layer w0.25: X2.12 18.87,-15.155 20.35,-13.675 23.95,-13.675 25.875,-11.75 U6.13
pads on no net: MOD1.1 MOD1.8 MOD1.9 MOD1.11 MOD1.12 X1.0 X1.3 X1.4 X2.3 X2.4

## Silkscreen, mask and mechanical layers (free items; w line width, h text height)
Top Overlay:
  text "3V-5V Interface / for Base 18" at 3.75,-37 h2 r90
Bottom Overlay:
  text "J7 (C) KnivD @me.com" at 84,-33.825 h2 r270
Mechanical 1:
  the board outline again, w0.4
Drill Drawing:
  text "PCB parameters: HASL, FR-4, 1.6mm / 1oz, green soldermask, white overlay" at 8.25,-48.25 h2